# EAGLE board audiokarma (EAGLE 7.5.0)
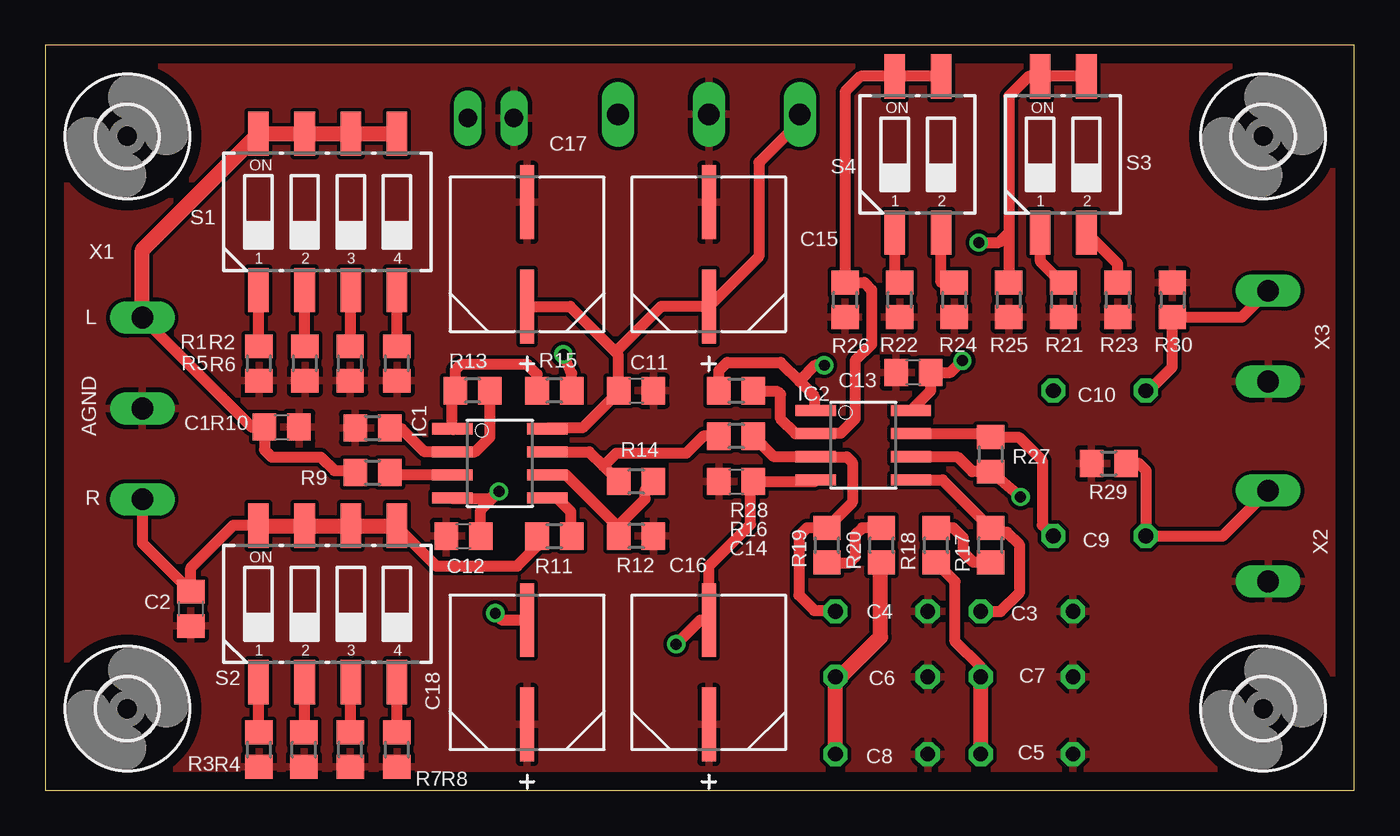
[diagram p0: board, top side]
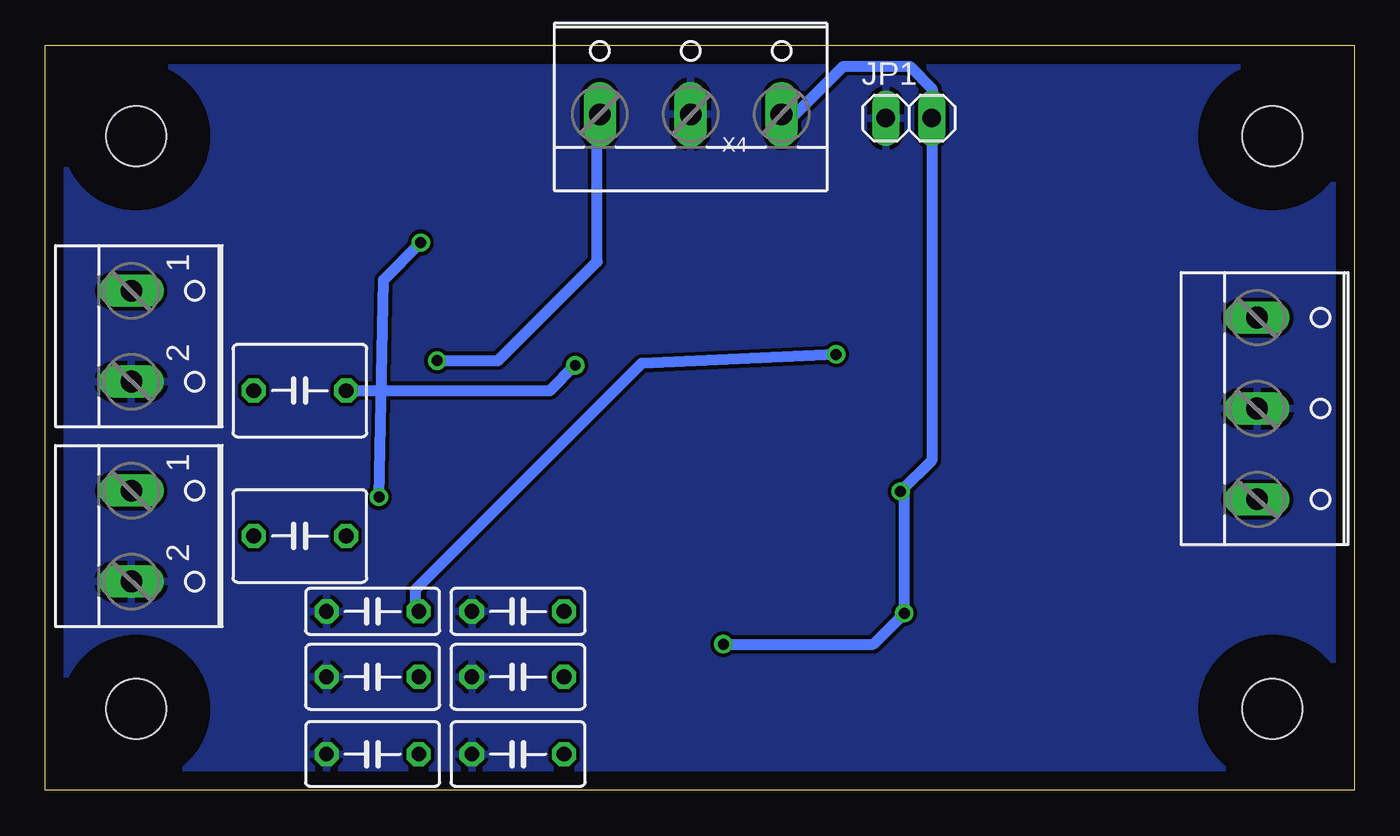
[diagram p1: board, bottom side, seen from below]

Size 72 x 41 mm. Coordinates in mm from the lower left corner, seen from the top.
Outline: 0,0 72,0 72,41 0,41 0,0
Copper layers (1*16): Top 0.035mm / dielectric 1.5mm / Bottom 0.035mm
Design rules "default": minimum track width 10mil, minimum drill 24mil, track to track 8mil, track to pad 8mil, pad to pad 8mil, via to via 8mil, smd to smd 8mil, copper to edge 40mil, drill to drill 8mil, minimum pad ring 10mil, minimum via ring 8mil, stop-mask expansion 4mil, vias tented up to drill 0mil, thermal gap 10mil

## Footprints (pad centres in the part's own frame; a part is rotated, then mirrored left to right if it is on the bottom)
C0805 = smd 1.3 x 1.5: 1 -0.95,0; 2 0.95,0
C050-025X075 = drill 0.813 octagon: 1 -2.54,0; 2 2.54,0
C050-035X075 = drill 0.813 octagon: 1 -2.54,0; 2 2.54,0
C050-050X075 = drill 0.813 octagon: 1 -2.54,0; 2 2.54,0
CAPAE830X650N = smd 4.064 x 0.762: 1 -2.87,0; 2 2.87,0
3,3 = hole 3.3: 0,0
SO08 = smd 0.61 x 2.21: 1 -1.905,-2.616; 2 -0.635,-2.616; 3 0.635,-2.616; 4 1.905,-2.616; 5 1.905,2.616; 6 0.635,2.616; 7 -0.635,2.616; 8 -1.905,2.616
1X02 = drill 1.016 long: 1 -1.27,0; 2 1.27,0
R0805 = smd 1.3 x 1.5: 1 -0.95,0; 2 0.95,0
CTS-219-04 = smd 1.13 x 2.44: 1 -3.81,-4.3; 2 -1.27,-4.3; 3 1.27,-4.3; 4 3.81,-4.3; 5 3.81,4.3; 6 1.27,4.3; 7 -1.27,4.3; 8 -3.81,4.3
CTS-219-02 = smd 1.13 x 2.44: 1 -1.27,-4.3; 2 1.27,-4.3; 3 1.27,4.3; 4 -1.27,4.3
W237-103 = drill 1.194 long: 1 -5,-1.29; 2 0,-1.29; 3 5,-1.29
W237-102 = drill 1.194 long: 1 -2.5,-1.27; 2 2.5,-1.27

## Placement (x,y rotation side)
C1  0-200p  [C0805]  13,20 0 top
C2  0-200p  [C0805]  8,10 270 top
C3  47nF  [C050-025X075]  54,9.85 180 bottom
C4  47nF  [C050-025X075]  46,9.85 180 bottom
C5  68nF  [C050-035X075]  54,2 180 bottom
C6  68nF  [C050-035X075]  46,6.25 180 bottom
C7  68nF  [C050-035X075]  54,6.25 180 bottom
C8  68nF  [C050-035X075]  46,2 180 bottom
C9  1uF  [C050-050X075]  58,14 180 bottom
C10  1uF  [C050-050X075]  58,22 180 bottom
C11  100nF  [C0805]  32.5,22 0 top
C12  100nF  [C0805]  23,14 0 top
C13  100nF  [C0805]  47.75,23 180 top
C14  100nF  [C0805]  38,17 0 top
C15  22UF  [CAPAE830X650N]  36.5,29.5 90 top
C16  22UF  [CAPAE830X650N]  36.5,6.5 90 top
C17  22UF  [CAPAE830X650N]  26.5,29.5 90 top
C18  22UF  [CAPAE830X650N]  26.5,6.5 90 top
H1  MOUNT-HOLE3.3  [3,3]  4.5,36 0 top
H2  MOUNT-HOLE3.3  [3,3]  67,36 0 top
H3  MOUNT-HOLE3.3  [3,3]  4.5,4.5 0 top
H4  MOUNT-HOLE3.3  [3,3]  67,4.5 0 top
IC1  OPA2134U  [SO08]  25,18 270 top
IC2  OPA2134U  [SO08]  45,19 270 top
JP1  [1X02]  24.5,37 0 bottom
R1  150k  [R0805]  11.75,23.5 90 top
R2  110k  [R0805]  14.28,23.5 90 top
R3  150k  [R0805]  11.75,2.25 90 top
R4  110k  [R0805]  14.22,2.25 90 top
R5  82k  [R0805]  16.76,23.5 90 top
R6  33k  [R0805]  19.34,23.5 90 top
R7  82k  [R0805]  16.77,2.25 90 top
R8  33k  [R0805]  19.34,2.25 90 top
R9  2k2  [R0805]  18,17.5 0 top
R10  100  [R0805]  18,19.95 0 top
R11  2k2  [R0805]  28,14 0 top
R12  100  [R0805]  32.5,14 180 top
R13  3k3  [R0805]  23.5,22 180 top
R14  3k3  [R0805]  32.5,17 180 top
R15  16k  [R0805]  28,22 180 top
R16  16k  [R0805]  38,19.5 180 top
R17  2k2  [R0805]  52,13.5 90 top
R18  130  [R0805]  49,13.5 90 top
R19  2k2  [R0805]  43,13.5 90 top
R20  130  [R0805]  46,13.5 90 top
R21  300  [R0805]  56,27 90 top
R22  300  [R0805]  47,27 90 top
R23  180  [R0805]  59,27 90 top
R24  180  [R0805]  50,27 90 top
R25  300  [R0805]  53,27 90 top
R26  300  [R0805]  44,27 90 top
R27  3k3  [R0805]  52,18.5 270 top
R28  3k3  [R0805]  38,22 0 top
R29  110k  [R0805]  58.5,18 0 top
R30  110k  [R0805]  62,27 270 top
S1  219-04  [CTS-219-04]  15.53,31.84 0 top
S2  219-04  [CTS-219-04]  15.53,10.27 0 top
S3  219-02  [CTS-219-02]  56,35 0 top
S4  219-02  [CTS-219-02]  48,35 0 top
X1  [W237-103]  4.04,21.02 270 bottom
X2  [W237-102]  66,14 270 bottom
X3  [W237-102]  66,25 270 bottom
X4  [W237-103]  36.5,38.5 0 bottom

## Library data of the parts
C1-C14 R1-R30 = rcl
C15-C18 = Panasonic-EEE0_EEE1_EEE2_EEEFC; MPN: EEE-FC1H220P; OC_FARNELL: 9694579; OC_NEWARK: 91K9619; PACKAGE: CASE-E; SUPPLIER: PANASONIC; TOLERANCE: 20%; VOLTAGERATING: 50V
H1-H4 = holes
IC1 IC2 = burr-brown; MF: TEXAS INSTRUMENTS; MPN: OPA2134UA; OC_FARNELL: 1206935; OC_NEWARK: 35C1847
JP1 = pinhead
S1-S4 = switch-dil; OC_FARNELL: unknown; OC_NEWARK: unknown
X1 X4 = con-wago-500; MPN: 237-103; OC_FARNELL: unknown; OC_NEWARK: 18M7116
X2 X3 = con-wago-500; MPN: 237-102; OC_FARNELL: unknown; OC_NEWARK: 70K9898

## Nets
AGND: C1.2 C2.2 C3.2 C4.2 C5.2 C6.2 C7.2 C8.2 C11.2 C12.1 C13.2 C14.1 C15.2 C16.1 C17.2 C18.1 JP1.1 R1.1 R2.1 R3.1 R4.1 R5.1 R6.1 R7.1 R8.1 R10.1 R12.1 R21.1 R22.1 R23.1 R24.1 R25.1 R26.1 R29.1 R30.1 X1.2 X2.2 X3.2 X4.2
INPUT_L: C1.1 R9.1 S1.5 S1.6 S1.7 S1.8 X1.1
INPUT_R: C2.1 R11.1 S2.5 S2.6 S2.7 S2.8 X1.3
N$1: R1.2 S1.1
N$2: R2.2 S1.2
N$3: R5.2 S1.3
N$4: R6.2 S1.4
N$12: C9.1 IC2.7 R27.1
N$13: R3.2 S2.1
N$14: IC1.3 R9.2
N$15: IC1.2 R10.2 R13.1
N$16: C9.2 R29.2 X2.1
N$17: IC1.1 R13.2 R15.2
N$18: C3.1 IC2.5 R15.1 R17.2
N$19: R4.2 S2.2
N$20: R7.2 S2.3
N$21: R8.2 S2.4
N$22: C5.1 C7.1 R18.1
N$23: R17.1 R18.2
N$25: IC1.5 R11.2
N$26: IC2.6 R25.2 R27.2 S3.3 S3.4
N$27: R21.2 S3.1
N$28: R23.2 S3.2
N$29: IC1.6 R12.2 R14.1
N$30: IC1.7 R14.2 R16.2
N$31: C4.1 IC2.3 R16.1 R19.2
N$32: C6.1 C8.1 R20.1
N$33: R19.1 R20.2
N$34: IC2.2 R26.2 R28.2 S4.3 S4.4
N$35: R22.2 S4.1
N$36: R24.2 S4.2
N$37: C10.1 IC2.1 R28.1
N$38: C10.2 R30.2 X3.1
VCC: C11.1 C13.1 C15.1 C17.1 IC1.8 IC2.8 X4.1
VSS: C12.2 C14.2 C16.2 C18.2 IC1.4 IC2.4 JP1.2 X4.3

## Tracks (layer width: path | path; a pad name or v marks a point on that pad's centre or on a via)
AGND
  pour Bottom: 0.05,41.8 72.2,41.8 72.2,-0.3 0,-0.3 0,-0.15 -0.05,-0.15 -0.05,41.75
  pour Top: 0.1,41.65 72.25,41.65 72.25,-0.35 0.1,-0.35
INPUT_L
  Top 0.61: 5.68,26.02 X1.1 11.35,20 C1.1 12.05,18.75 12.45,18.35 15.15,18.35 15.9,17.6 16.95,17.6 R9.1
  Top 0.813: X1.1 5.33,29.75 S1.8 S1.7 S1.6 S1.5
INPUT_R
  Top 0.61: X1.3 5.33,13.62 C2.1 8,12.25 10.35,14.6 11.69,14.6 S2.8 | S2.5 19.34,14.51 21.5,12.35 25.95,12.35 27.05,13.45 R11.1
  Top 0.813: S2.8 S2.7 S2.6 S2.5
N$1
  Top 0.61: R1.2 11.72,24.45 S1.1
N$2
  Top 0.61: R2.2 14.26,24.45 S1.2
N$3
  Top 0.61: R5.2 16.8,24.45 S1.3
N$4
  Top 0.61: R6.2 S1.4
N$12
  Top 0.61: IC2.7 51.81,19.64 R27.1 53.55,19.45 54.85,18.15 54.85,14.61 C9.1
N$13
  Top 0.61: R3.2 11.72,3.2 S2.1
N$14
  Top 0.61: IC1.3 19.09,17.36 R9.2
N$15
  Top 0.61: R10.2 19,19.9 19.6,19.9 20.86,18.64 IC1.2 23.64,18.64 24.45,19.45 R13.1
N$16
  Top 0.61: R29.2 60.15,18 60.55,17.6 C9.2 64.77,14 X2.1
N$17
  Top 0.61: 22.44,19.85 IC1.1 22.38,21.83 R13.2 22.55,23.15 22.85,23.45 26.5,23.45 27.05,22.9 R15.2
N$18  (via drill 0.6)
  Top 0.61: C3.1 52.55,9.85 53.6,10.9 53.6,13.5 52.9,14.2 52.25,14.2 R17.2 49.35,17.09 IC2.5 | R15.1 28.95,22.95 v28.5,24
  Bottom 0.61: v28.5,24 39.2,23.5 51.65,11.05 51.65,10.04 C3.1
N$19
  Top 0.61: R4.2 14.26,3.2 S2.2
N$20
  Top 0.61: R7.2 16.8,3.2 S2.3
N$21
  Top 0.61: R8.2 S2.4
N$22
  Top 0.61: C7.1 51.46,6.79 50.05,8.2 50.05,11.5 R18.1
  Top 0.813: C5.1 C7.1
N$23
  Top 0.61: R17.1 51.05,12.55 50.5,13.1 50.5,13.9 49.95,14.45 R18.2
N$25
  Top 0.61: IC1.5 28.16,16.09 28.9,15.35 28.9,14.05 R11.2
N$26  (via drill 0.6)
  Top 0.61: S3.3 S3.4 54.1,39.3 53,38.2 53,30.7 | 53,30.7 R25.2 | IC2.6 50.2,18.35 51,17.55 R27.2 v53.65,16.15 | v51.35,30.15 52.45,30.15 53,30.7
  Bottom 0.61: v53.65,16.15 53.4,28.1 v51.35,30.15
N$27
  Top 0.61: R21.2 55.9,27.95 54.75,29.1 54.75,30.68 S3.1
N$28
  Top 0.61: R23.2 59,28.97 S3.2
N$29
  Top 0.61: IC1.6 28.64,17.36 31.4,14.6 31.4,14.15 R12.2 31.55,14.6 33,16.05 33,16.55 R14.1
N$30
  Top 0.61: IC1.7 29.91,18.64 30.7,17.85 | 30.7,17.85 R14.2 | R16.2 36.2,19.5 35.25,18.55 31.4,18.55 30.7,17.85
N$31
  Top 0.61: C4.1 43.41,9.9 42.3,9.9 41.45,10.75 41.45,14 41.9,14.45 R19.2 44.4,15.85 44.4,18.05 44.09,18.36 IC2.3 40.09,18.36 R16.1
N$32
  Top 0.813: C8.1 C6.1 43.75,6.25 45.95,8.45 45.95,12.5 R20.1
N$33
  Top 0.61: R20.2 44.95,14.45 44.55,14.05 44.55,12.85 44.2,12.5 43.05,12.5 R19.1
N$34
  Top 0.61: S4.3 S4.4 44.85,39.3 44,38.45 R26.2 45.05,27.95 45.45,27.55 45.45,24.55 44.55,23.65 44.55,20.45 43.75,19.65 42.4,19.65 IC2.2 41.27,19.64 40.45,20.45 40.45,21.8 40.3,21.95 39,21.95 R28.2
N$35
  Top 0.61: R22.2 46.73,27.95 S4.1
N$36
  Top 0.61: R24.2 49.27,27.95 S4.2
N$37  (via drill 0.6)
  Top 0.61: R28.1 37.05,23.1 37.5,23.55 40.45,23.55 41.48,22.52 | 41.48,22.52 42.3,21.7 42.3,20.99 IC2.1 | v42.85,23.4 42.35,23.4 41.48,22.52
  Bottom 0.61: C10.1 44.25,22 v42.85,23.4
N$38
  Top 0.61: X3.1 65.82,26.05 R30.2 62,23.3 60.7,22 C10.2
VCC  (via drill 0.6)
  Top 0.61: C17.1 28.87,26.63 31.38,24.12 | 31.38,24.12 31.5,24 31.5,22.05 | 31.5,22.05 C11.1 | 31.5,22.05 31.5,21.9 29.55,19.95 27.66,19.95 IC1.8 | X4.1 41.5,36.8 39.25,34.55 39.25,29.38 C15.1 33.88,26.63 31.38,24.12 | v50.45,23.65 49.8,23 C13.1 48.7,21.99 IC2.8
  Bottom 0.61: v50.45,23.65 47.1,23.65 41.65,29.1 41.65,37.06 X4.1
VSS  (via drill 0.6)
  Top 0.61: IC1.4 22.43,16.05 24.45,16.05 24.85,16.45 v24.95,16.45 23.95,15.45 C12.2 | C18.2 25.13,9.37 v24.75,9.75 | IC2.4 42.29,17 C14.2 38.8,16.85 38.8,14.65 36.5,12.35 C16.2 36.02,9.37 v34.7,8.05
  Bottom 0.61: X4.3 30.74,37.21 28.1,39.85 24.45,39.85 23.2,38.6 23.2,37.03 JP1.2 23.23,18.17 v24.95,16.45 24.75,16.25 v24.75,9.75 26.45,8.05 v34.7,8.05

## Text on the board
tNames: L | AGND | R